# Altium PCB CC3200核心板pcb尺寸及示意图.PcbDoc
Units mil, origin at the board's own origin, x right, y up, seen from the top; angles counter-clockwise.
Board outline 1000 x 1951 mil, 4 copper layers (Top Layer, GND, POWER, Bottom Layer), stack 30.634 mil thick; 8 components, 0 nets, 121 pads, 0 vias.
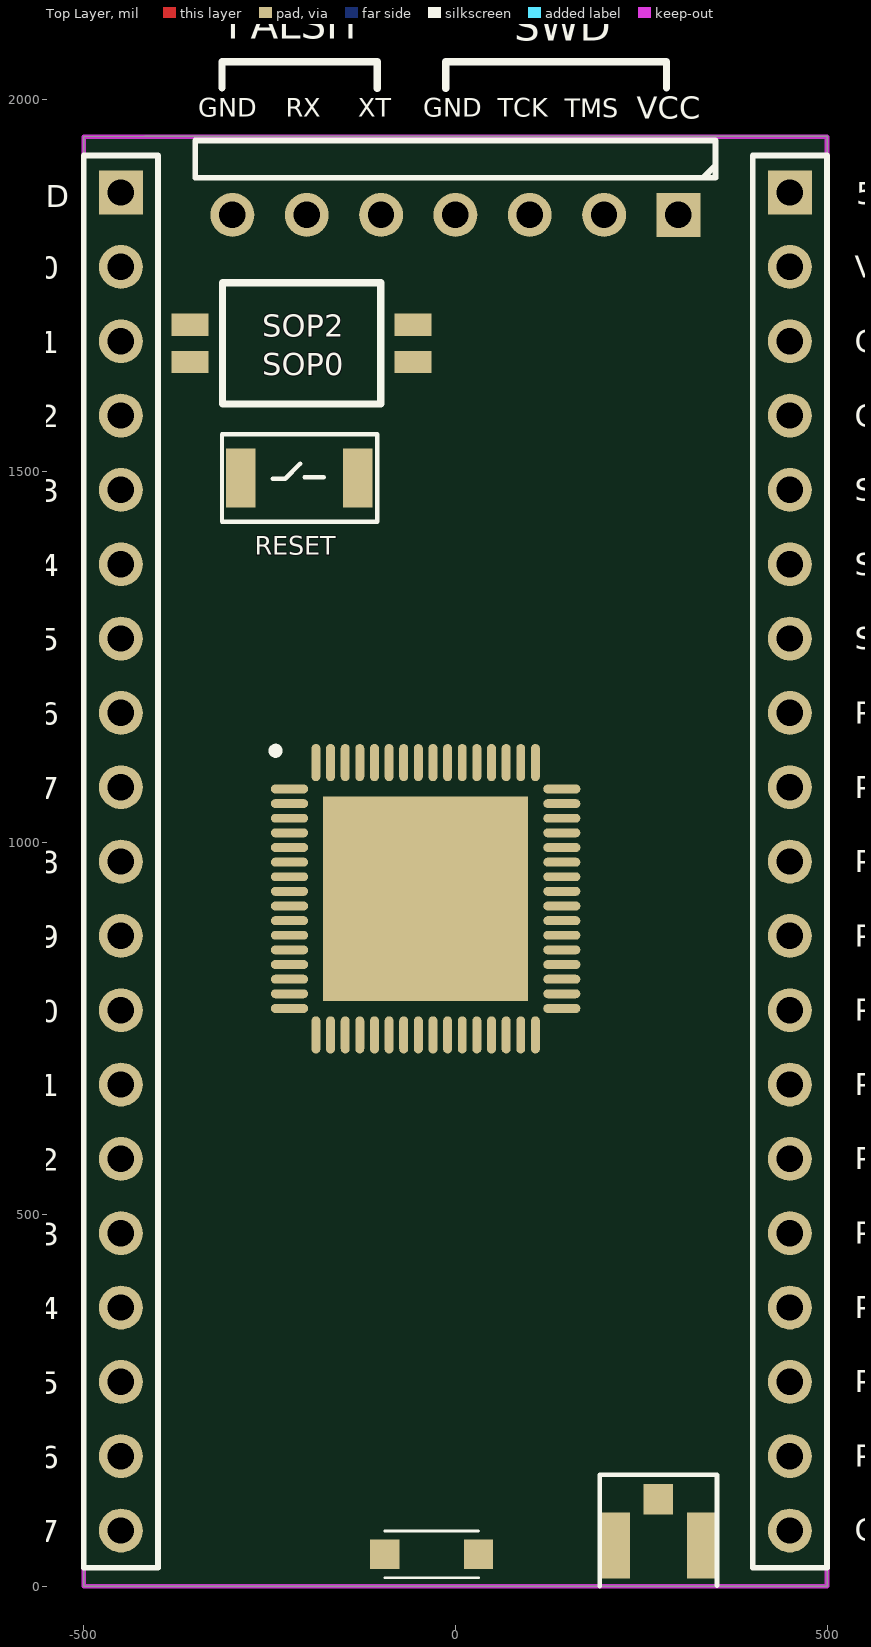
[diagram p0: Top Layer view]
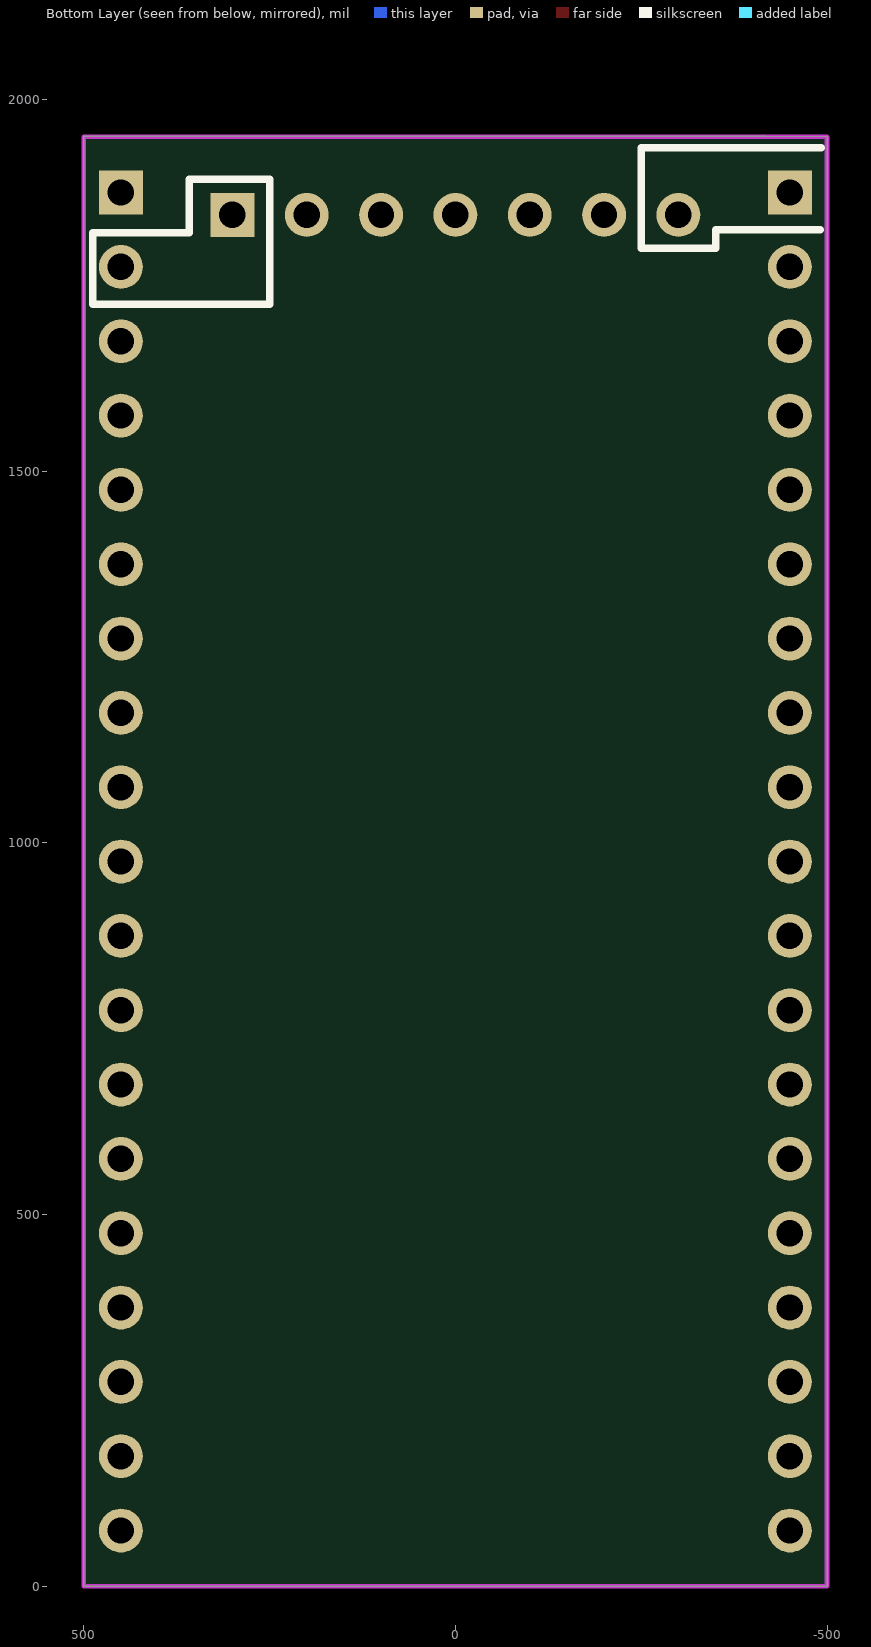
[diagram p1: Bottom Layer view, seen from below]

## Layer stack, top to bottom
Top Solder: solder mask 0.4, Solder Resist, Dk 3.5
Top Layer: signal copper 1.4
Dielectric 1: core 10, FR-4, Dk 4.2
GND: signal copper 1.417
Dielectric 3: prepreg 5, Dk 4.2
POWER: signal copper 1.417
Dielectric 2: core 10, Dk 4.2
Bottom Layer: signal copper 1.4
Bottom Solder: solder mask 0.4, Solder Resist, Dk 3.5

## Board outline
-418,1951 500,1951 500,13 500,0 466,0 -500,0 -500,1950

## Design rules (kind name [scope] priority, off if disabled: settings)
Clearance [All] p1: gap=7
HoleToHoleClearance [All] p1: gap=0 allowstackedmicrovias=TRUE
MinimumSolderMaskSliver [All] p1: minsoldermaskwidth=0
PolygonConnect [All vs (InPadClass('All Pads'))] p1: connectstyle=Relief reliefconductorwidth=20 reliefentries=4 polygonreliefangle="90 Angle" airgapwidth=10
PolygonConnect PolygonConnect_1 [All] p2: connectstyle=Direct reliefconductorwidth=10 reliefentries=4 polygonreliefangle="90 Angle" airgapwidth=10
RoutingVias [All] p1: holewidth=15.75 width=50 viastyle="Through Hole" minholewidth=15.75 minwidth=50 maxholewidth=28 maxwidth=50
SilkToSilkClearance [All] p1: silktosilkclearance=0
SilkToSolderMaskClearance [IsPad] p1: minsilkscreentomaskgap=0 clearancetoexposedcopper=TRUE
SolderMaskExpansion [All] p1: expansion=4
Width [All] p1: maxlimit=50 minlimit=6.5 preferedwidth=10
25 further rules are at their usual default settings.

## Components (designator, comment, footprint, x,y, rotation, side; value= is the part's Value field where it differs from the comment)
E1 "AH316M245001-T" AH316 -32,43 r180 top
J1 "CONN_U.FL" IPEX 273,55 r180 top
P2 "Header 7H" HDR1X7H 300,1845 r180 top
P3 "Header 19" HDR1X19 -450,1875 r270 top
P4 "Header 19" HDR1X19 450,1875 r270 top
RESET "" 5032-s -210,1491 r90 top (schematic designator RESET1)
S1 "switch" 2p -207,1672 r270 top
U1 "CC3200" PVQFN-N64 -40,925 r0 top locked

## Footprints (in the part's own frame and the unit in brackets; to place one, negate y for a bottom-side part, rotate by r counter-clockwise, add the part's x,y. Pads: shape width x height; smd on the part's side, far side on the other; paste and mask are expansions set on the pad)
2p [mm]
  rect 0.76x1.27 smd: 1(0.635,3.81) 2(-0.635,3.81) 3(-0.635,-3.81) 4(0.635,-3.81)
  silkscreen extent -2.07,-2.7 2.07,2.7
5032-s [mm]
  rect 2x1 smd: 1(0,2) 2(0,-2)
  silkscreen extent -1.5,-2.67 1.5,2.64
AH316 [mm]
  rect 1x1 smd: 1(-1.6,0) 2(1.6,0)
  silkscreen extent -1.6,-0.8 1.6,0.8
HDR1X7H [mm] "Connector; Header; 7 Position; Right Angle"
  rect 1.5x1.5 hole 0.9: 1(0,0)
  round 1.5 hole 0.9: 2(2.54,0) 3(5.08,0) 4(7.62,0) 5(10.16,0) 6(12.7,0) 7(15.24,0)
  silkscreen extent -1.27,-2.54 16.51,-1.27
HDR1X19 [mm] "Connector; Header; 19 Position"
  rect 1.5x1.5 hole 0.9: 1(0,0)
  round 1.5 hole 0.9: 2(2.54,0) 3(5.08,0) 4(7.62,0) 5(10.16,0) 6(12.7,0) 7(15.24,0) 8(17.78,0) 9(20.32,0) 10(22.86,0) 11(25.4,0) 12(27.94,0) 13(30.48,0) 14(33.02,0) 15(35.56,0) 16(38.1,0) 17(40.64,0) 18(43.18,0) 19(45.72,0)
  silkscreen extent -1.27,-1.27 46.99,1.27
IPEX [mm]
  rect 1.05x2.25 smd: 1(-1.5,0) 2(1.5,0)
  rect 1x1.05 smd: 3(0,-1.575)
  silkscreen extent -2,-2.41 2,1.4
PVQFN-N64 [mil]
  oval 50x12 smd: 1(-183.17,147.64) 2(-183.17,127.95) 3(-183.17,108.27) 4(-183.17,88.58) 5(-183.17,68.9) 6(-183.17,49.21) 7(-183.17,29.53) 8(-183.17,9.84) 9(-183.17,-9.84) 10(-183.17,-29.53) 11(-183.17,-49.21) 12(-183.17,-68.9) 13(-183.17,-88.58) 14(-183.17,-108.27) 15(-183.17,-127.95) 16(-183.17,-147.64) 33(183.17,-147.64) 34(183.17,-127.95) 35(183.17,-108.27) 36(183.17,-88.58) 37(183.17,-68.9) 38(183.17,-49.21) 39(183.17,-29.53) 40(183.17,-9.84) 41(183.17,9.84) 42(183.17,29.53) 43(183.17,49.21) 44(183.17,68.9) 45(183.17,88.58) 46(183.17,108.27) 47(183.17,127.95) 48(183.17,147.64)
  oval 12x50 smd: 17(-147.64,-183.17) 18(-127.95,-183.17) 19(-108.27,-183.17) 20(-88.58,-183.17) 21(-68.9,-183.17) 22(-49.21,-183.17) 23(-29.53,-183.17) 24(-9.84,-183.17) 25(9.84,-183.17) 26(29.53,-183.17) 27(49.21,-183.17) 28(68.9,-183.17) 29(88.58,-183.17) 30(108.27,-183.17) 31(127.95,-183.17) 32(147.64,-183.17) 49(147.64,183.17) 50(127.95,183.17) 51(108.27,183.17) 52(88.58,183.17) 53(68.9,183.17) 54(49.21,183.17) 55(29.53,183.17) 56(9.84,183.17) 57(-9.84,183.17) 58(-29.53,183.17) 59(-49.21,183.17) 60(-68.9,183.17) 61(-88.58,183.17) 62(-108.27,183.17) 63(-127.95,183.17) 64(-147.64,183.17)
  rect 275.59x275.59 smd: 65(0,0)
  silkscreen extent -206,195 -198,203

## Part data
E1: library part ANTENNA, "AH316M245001-T 2.45GHz Ant"
J1: library part jiekou
P2: "Header, 7-Pin, Right Angle"
P3 P4: "Header, 19-Pin"
RESET: library part SW-PB_V, "SWITCH"
S1: library part switch2p

## Nets (pads, with @x,y where several pads share a name; then routed paths per layer and width w, separated by ;. In a path a pad name is that pad's centre, name@x,y a point inside that pad or via, vN(x,y) a via of type N, cw(c..) or ccw(c..) an arc to the next point about the centre after c; other vN are vias at no path point)
pads on no net: E1.1 E1.2 J1.1 J1.2 J1.3 P2.1 P2.2 P2.3 P2.4 P2.5 P2.6 P2.7 P3.1 P3.2 P3.3 P3.4 P3.5 P3.6 P3.7 P3.8 P3.9 P3.10 P3.11 P3.12 P3.13 P3.14 P3.15 P3.16 P3.17 P3.18 P3.19 P4.1 P4.2 P4.3 P4.4 P4.5 P4.6 P4.7 P4.8 P4.9 P4.10 P4.11 P4.12 P4.13 P4.14 P4.15 P4.16 P4.17 P4.18 P4.19 RESET.1 RESET.2 S1.1 S1.2 S1.3 S1.4 U1.1 U1.2 U1.3 U1.4 U1.5 U1.6 U1.7 U1.8 U1.9 U1.10 U1.11 U1.12 U1.13 U1.14 U1.15 U1.16 U1.17 U1.18 U1.19 U1.20 U1.21 U1.22 U1.23 U1.24 U1.25 U1.26 U1.27 U1.28 U1.29 U1.30 U1.31 U1.32 U1.33 U1.34 U1.35 U1.36 U1.37 U1.38 U1.39 U1.40 U1.41 U1.42 U1.43 U1.44 U1.45 U1.46 U1.47 U1.48 U1.49 U1.50 U1.51 U1.52 U1.53 U1.54 U1.55 U1.56 U1.57 U1.58 U1.59 U1.60 U1.61 U1.62 U1.63 U1.64 U1.65

## Keep-outs
Keep-Out Layer:
  lines w6.5: -500,0 -500,1950 500,1950 500,0 -500,0

## Silkscreen, mask and mechanical layers (free items; w line width, h text height)
Top Overlay:
  lines w10: -314,2016 -314,2051 -105,2051 -105,2015 ; -13,2015 -13,2051 284,2051 284,2016
  text "FALSH" at -307,2082 h40
  text "SWD" at 79,2079 h40
  text "GND" at -346,1977 h25
  text "RX" at -228,1977 h25
  text "TX" at -86,1977 h25
  text "GND" at -43,1977 h25
  text "TCK" at 57,1977 h25
  text "TMS" at 147,1976 h25
  text "VCC" at 244,1974.05 h30
  text "5V" at 539,1859 h30
  text "GND" at -614,1855 h30
  text "VCC" at 537,1760.05 h30
  text "P00" at -611,1759 h30
  text "SOP2" at -260,1681 h30
  text "GND" at 537,1660.11 h30
  text "P01" at -611,1659 h30
  text "SOP0" at -260,1629 h30
  text "GND" at 537,1560.17 h30
  text "P02" at -611,1559 h30
  text "SOP2" at 537,1460.22 h30
  text "P03" at -611,1459 h30
  text "SOP1" at 537,1360.28 h30
  text "P04" at -611,1359 h30
  text "SOP0" at 537,1260.33 h30
  text "P05" at -611,1259 h30
  text "REST" at 537,1160.39 h30
  text "P06" at -611,1159 h30
  text "P31" at 537,1060.44 h30
  text "P07" at -611,1059 h30
  text "P30" at 537,960.5 h30
  text "P08" at -611,959 h30
  text "P29" at 537,860.56 h30
  text "P09" at -611,859 h30
  text "P28" at 537,760.61 h30
  text "P10" at -611,759 h30
  text "P27" at 537,660.67 h30
  text "P11" at -611,659 h30
  text "P26" at 537,560.72 h30
  text "P12" at -611,559 h30
  text "P25" at 537,460.78 h30
  text "P13" at -611,459 h30
  text "P24" at 537,360.83 h30
  text "P14" at -611,359 h30
  text "P23" at 537,260.89 h30
  text "P15" at -611,259 h30
  text "P22" at 537,160.94 h30
  text "P16" at -611,159 h30
  text "GND" at 537,61 h30
  text "P17" at -611,59 h30
Bottom Overlay:
  lines w10: -492,1935 -250,1935 -250,1800 -350,1800 -350,1825 -491,1825 ; 250,1725 250,1893 358,1893 358,1821 488,1821 488,1725 250,1725

## Dimensions
-450,75 to 450,75 on Top Overlay
-450,75 to 450,75 on Top Overlay
-500,0 to 500,6.5 on Top Overlay
-500,0 to 500,0 on Top Overlay
-500,0 to -500,1950 on Top Overlay
-500,1950 to -500,0 on Top Overlay
-450,1875 to -450,75 on Top Overlay